# EAGLE board ebook_reader_tsc_pcb (EAGLE 9.7.0)
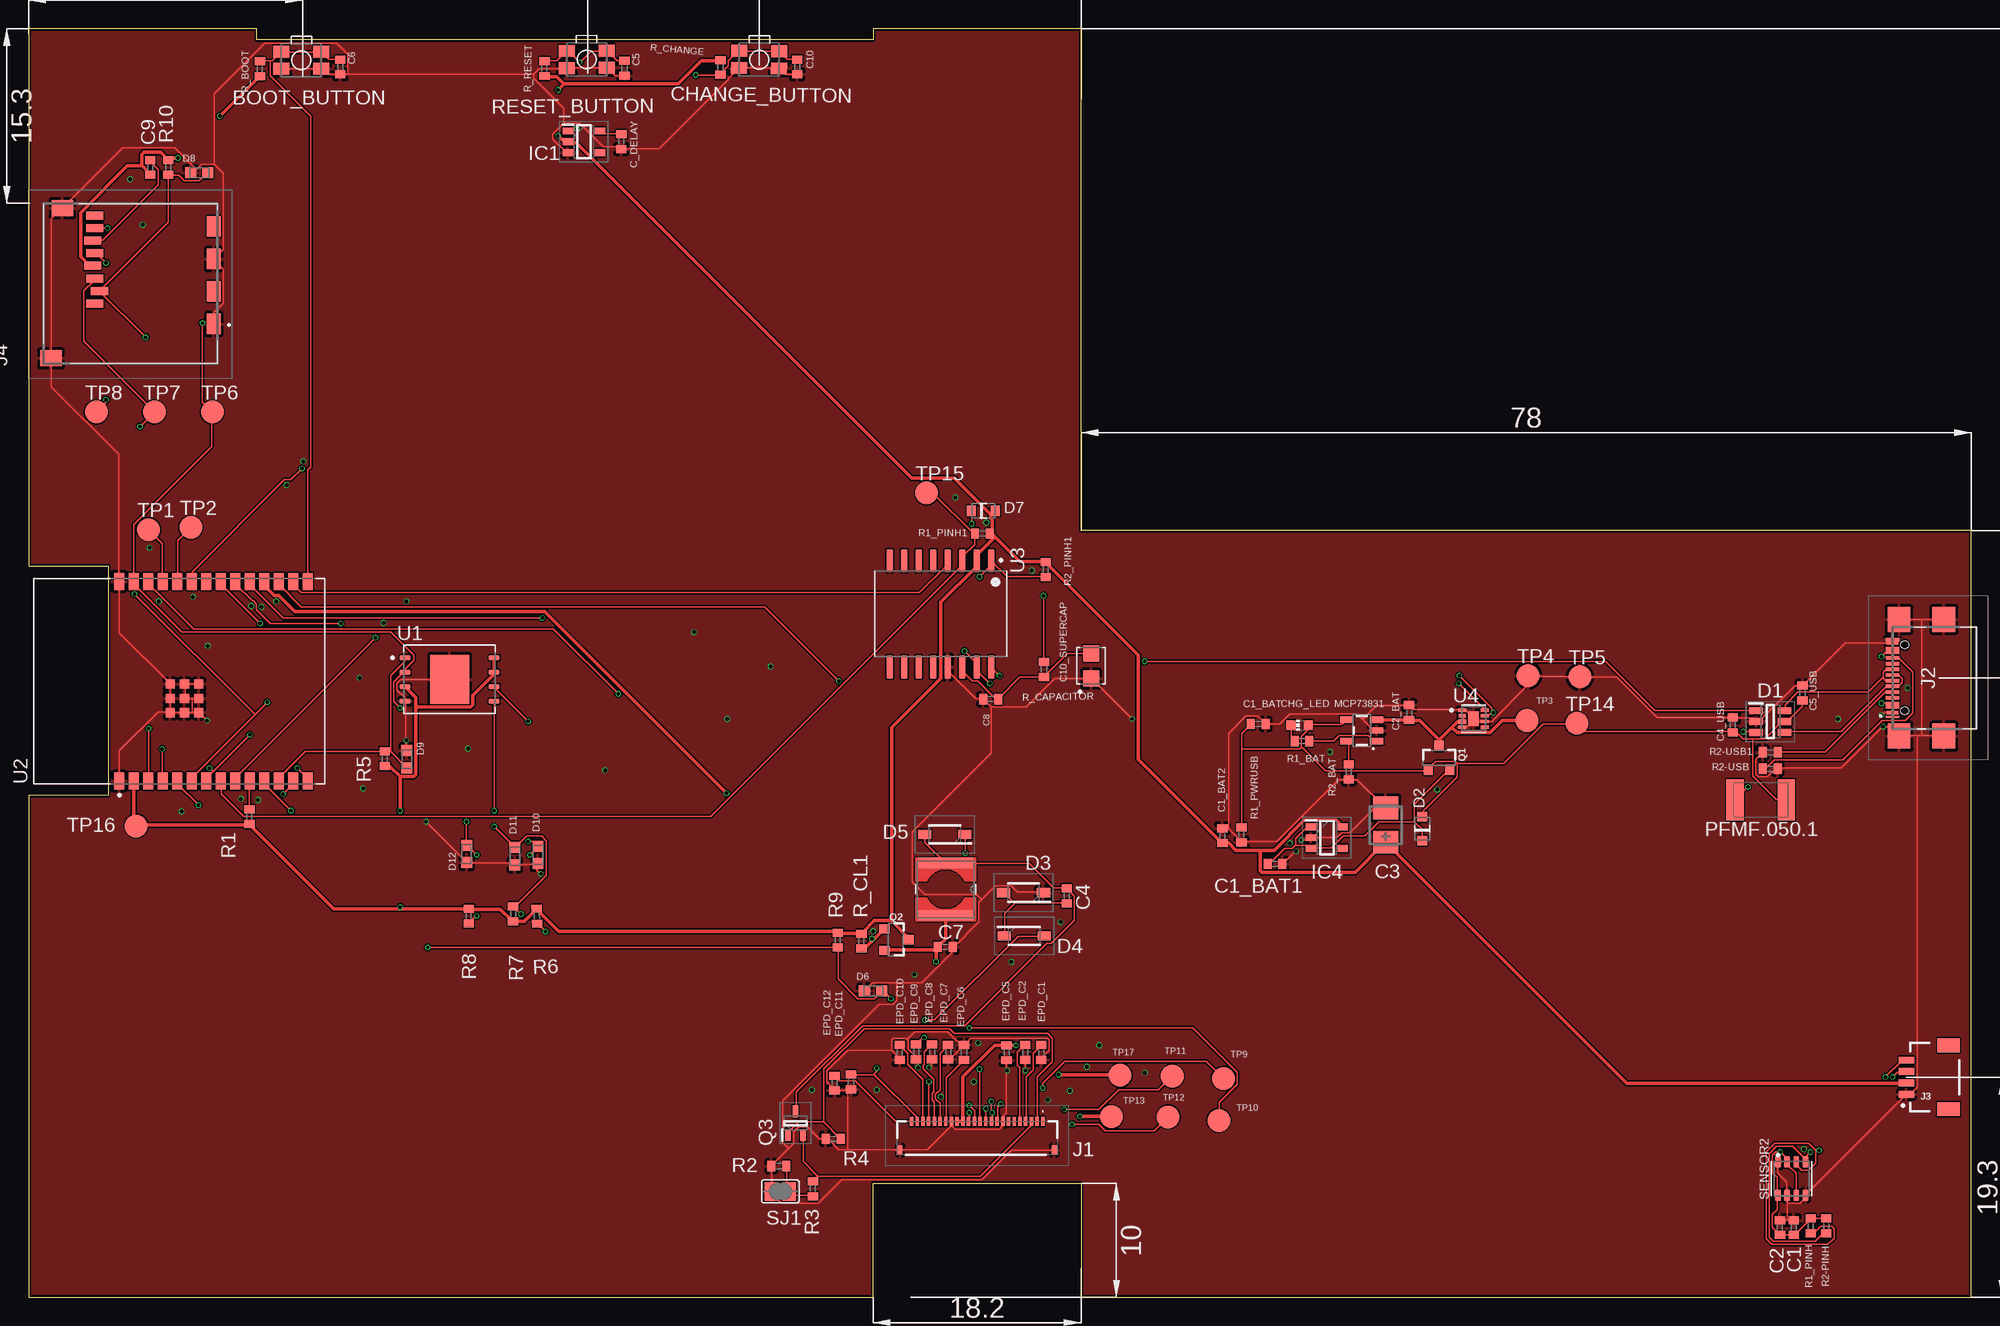
[diagram p0: board, top side]
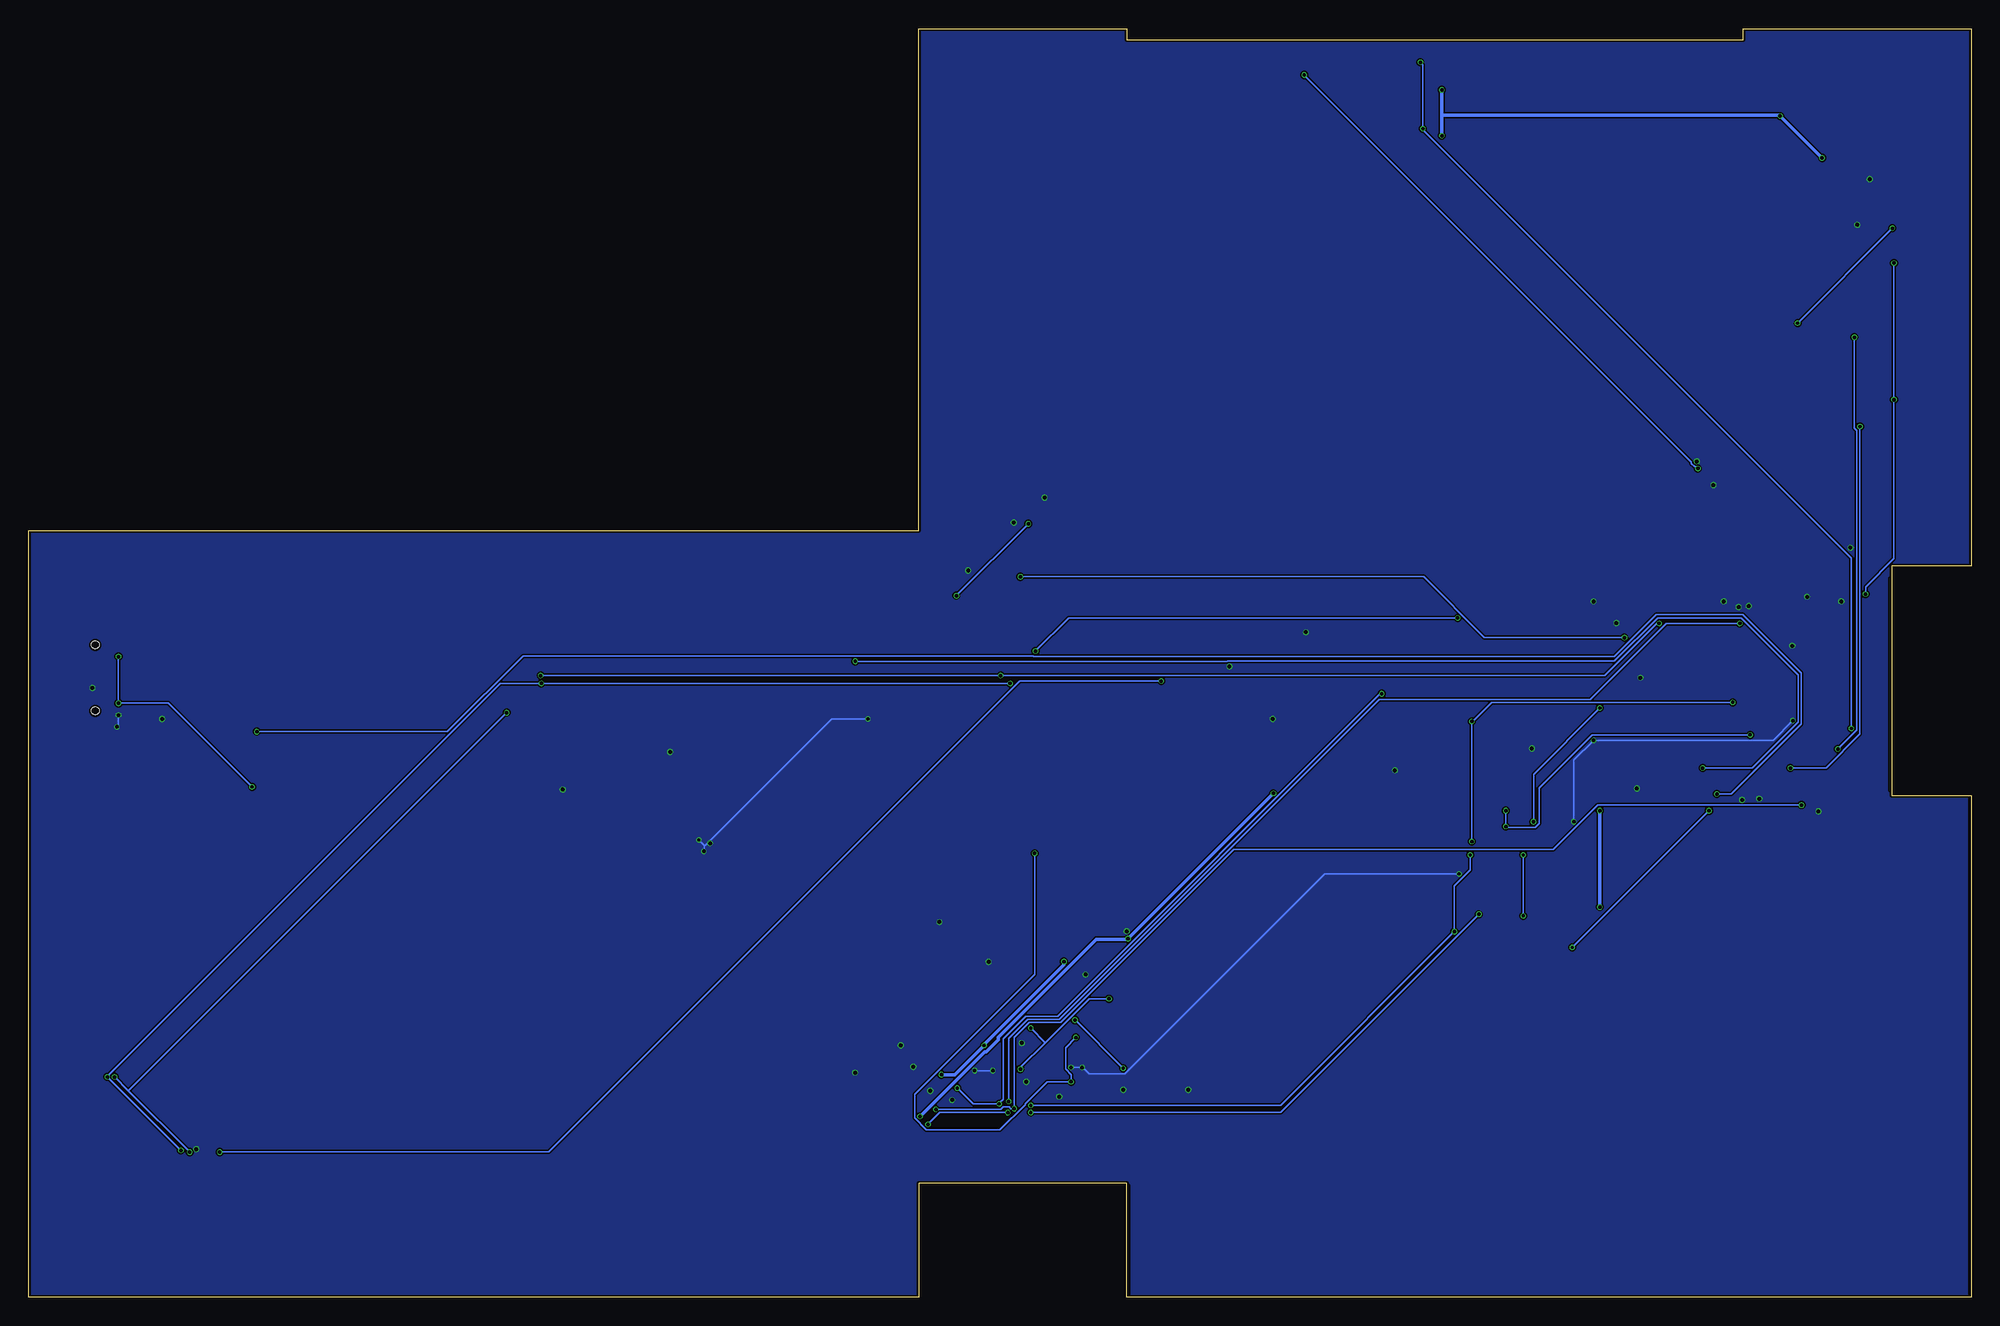
[diagram p1: board, bottom side, seen from below]

Size 170.2 x 111.2 mm. Coordinates in mm from the lower left corner, seen from the top.
Outline: 0,0 74,0 74,10 92.2,10 92.2,0 170.2,0 170.2,67.2 92.2,67.2 92.2,111.2 74,111.2 74,110.2 20,110.2 20,111.2 0,111.2 0,64.1 7,64.1 7,44 0,44 0,0
Copper layers (1*16): Top 0.035mm / dielectric 1.6mm / Bottom 0.035mm
Design rules "jlcpcb-2layers.dru": minimum track width 0.15mm, minimum drill 0.3mm, track to track 5mil, track to pad 5mil, pad to pad 5mil, via to via 5mil, smd to smd 5mil, copper to edge 0.2mm, drill to drill 6mil, minimum pad ring 10mil, minimum via ring 3mil, stop-mask expansion 4mil, vias tented up to drill 0mil, thermal gap 10mil
Net classes: 1 alim: width 0.3 mm

## Footprints (pad centres in the part's own frame; a part is rotated, then mirrored left to right if it is on the bottom)
MYBUTTON = smd 1.4 x 1.05: 1 1.75,0.75; 2 -1.75,0.75; 3 -1.75,-0.75; 4 1.75,-0.75
ESP32_WROVER_EAGLE-LTSPICE_C0402 = smd 0.7 x 0.9: 1 -0.65,0; 2 0.65,0
RCL_CT3528 = smd 2 x 2.2: + -1.5,0; - 1.5,0
CAPCP3225X100N = smd 1.4 x 1.4: 1 -1.1,0; 2 1.1,0
ADAFRUIT_CHIP-LED0603 = smd 0.8 x 0.8: A 0,-0.75; C 0,0.75
SOT95P280X145-6N = smd 1.2 x 0.6: 1 -1.25,0.95; 2 -1.25,0; 3 -1.25,-0.95; 4 1.25,-0.95; 5 1.25,0; 6 1.25,0.95
ESP32_WROVER_AVX---SD0805S020S1R0_AVX_SD0805S020S1R0_0 = smd 0.8 x 0.9: 1 -1.05,0; 2 1.05,0
SOD3716X135N = smd 1.15 x 0.8: 1 -1.75,0; 2 1.75,0
DIOC1608X36N = smd 0.97 x 0.94: 1 -0.75,0; 2 0.75,0
SOT95P280X125-5N = smd 0.9 x 0.6: 1 -1.4,0.95; 2 -1.4,0; 3 -1.4,-0.95; 4 1.4,-0.95; 5 1.4,0.95
SOT95P280X120-5N = smd 0.9 x 0.6: 1 -1.4,0.95; 2 -1.4,0; 3 -1.4,-0.95; 4 1.4,-0.95; 5 1.4,0.95
FH34SRJ24S05SH99 = smd 0.3 x 0.8: 1 5.75,1.45; 2 5.25,1.45; 3 4.75,1.45; 4 4.25,1.45; 5 3.75,1.45; 6 3.25,1.45; 7 2.75,1.45; 8 2.25,1.45; 9 1.75,1.45; 10 1.25,1.45; 11 0.75,1.45; 12 0.25,1.45; 13 -0.25,1.45; 14 -0.75,1.45; 15 -1.25,1.45; 16 -1.75,1.45; 17 -2.25,1.45; 18 -2.75,1.45; 19 -3.25,1.45; 20 -3.75,1.45; 21 -4.25,1.45; 22 -4.75,1.45; 23 -5.25,1.45; 24 -5.75,1.45 | smd 0.4 x 0.8: MP1 6.75,-1.05; MP2 -6.75,-1.05
SAMACSYS_PARTS_USB4110GFA = smd 0.173 x 1.15: A1 -3.426,3.678 | smd 0.3 x 1.15: A4 -2.55,3.678; A5 -1.25,3.678; A6 -0.25,3.678; A7 0.25,3.678; A8 1.25,3.678; A9 2.55,3.678; A12 3.35,3.678; B4 2.25,3.678; B5 1.75,3.678; B6 0.75,3.678; B7 -0.75,3.678; B8 -1.75,3.678; B9 -2.25,3.678 | smd 0.3 x 1.023: B1 3.05,3.678; B12 -3.05,3.678 | smd 2.18 x 2: MP1 -5.11,-0.827; MP2 5.11,-0.827; MP3 -5.11,3.103; MP4 5.11,3.103 | hole 0.65: -2.89,2.603; 2.89,2.603
JST04_1MM_RA = smd 0.6 x 1.35: 1 -1.5,0; 2 -0.5,0; 3 0.5,0; 4 1.5,0 | smd 1.2 x 2: NC1 2.8,-3.675; NC2 -2.8,-3.675
112ATAARR03ATTEND = smd 1.8 x 1.2: G1 10.6,10.4; G2 4.9,10.4; S1 7.75,10.4; S2 2.05,10.4 | smd 1.4 x 1.9: G3 13.6,-3.85; G4 0.45,-2.85 | smd 0.7 x 1.5: P1 8.8,0; P2 7.7,0.4; P3 6.6,0; P4 5.5,-0.2; P5 4.4,0; P6 3.3,-0.2; P7 2.2,0; P8 1.1,0
IND_4828-WE-TPC_WRE = smd 0.889 x 4.826: 1 -2.286,0; 2 2.286,0
ESP32_WROVER_SPARKFUN-IC-POWER_SOT23-5 = smd 0.55 x 1.2: 1 -0.95,-1.3; 2 0,-1.3; 3 0.95,-1.3; 4 0.95,1.3; 5 -0.95,1.3
ESP32C6_VARISTOR_CT/CN1812 = smd 1.5 x 3.6: 1 -2.25,0; 2 2.25,0
ESP32_WROVER_SPARKFUN-DISCRETESEMI_SOT23-3 = smd 0.8 x 0.9: 1 -0.95,-1; 2 0.95,-1; 3 0,1.1
SOT65P210X110-3N = smd 1.05 x 0.5: 1 -1.05,0.65; 2 -1.05,-0.65; 3 1.05,0
ESP32_WROVER_EAGLE-LTSPICE_R0402 = smd 0.7 x 0.9: 1 -0.65,0; 2 0.65,0
ESP32_WROVER_BME680_PSON80P300X300X100-8N = smd 1.016 x 0.5: 1 1.458,1.2; 2 1.458,0.4; 3 1.458,-0.4; 4 1.458,-1.2; 5 -1.458,-1.22; 6 -1.458,-0.4; 7 -1.458,0.4; 8 -1.458,1.2
SJ = smd 1.168 x 1.6: 1 -0.762,0; 2 0.762,0
TP20R = smd 2 x 2: TP 0,0
SON127P600X800X80-9N = smd 0.94 x 0.44: 1 -3.895,1.905; 2 -3.895,0.635; 3 -3.895,-0.635; 4 -3.895,-1.905; 5 3.895,-1.905; 6 3.895,-0.635; 7 3.895,0.635; 8 3.895,1.905 | smd 3.4 x 4.3: 9 0,0
XCVR_ESP32-C6-WROOM-1-N8 = smd 1.5 x 0.9: 1 -8.75,5.26; 2 -8.75,3.99; 3 -8.75,2.72; 4 -8.75,1.45; 5 -8.75,0.18; 6 -8.75,-1.09; 7 -8.75,-2.36; 8 -8.75,-3.63; 9 -8.75,-4.9; 10 -8.75,-6.17; 11 -8.75,-7.44; 12 -8.75,-8.71; 13 -8.75,-9.98; 14 -8.75,-11.25; 15 8.75,-11.25; 16 8.75,-9.98; 17 8.75,-8.71; 18 8.75,-7.44; 19 8.75,-6.17; 20 8.75,-4.9; 21 8.75,-3.63; 22 8.75,-2.36; 23 8.75,-1.09; 24 8.75,0.18; 25 8.75,1.45; 26 8.75,2.72; 27 8.75,3.99; 28 8.75,5.26 | smd 0.8 x 0.8: 29_1 -2.755,0.79; 29_2 -1.505,0.79; 29_3 -0.255,0.79; 29_4 -2.755,-0.46; 29_5 -1.505,-0.46; 29_6 -0.255,-0.46; 29_7 -2.755,-1.71; 29_8 -1.505,-1.71; 29_9 -0.255,-1.71
SOIC127P1032X265-16N = smd 2.05 x 0.59: 1 -4.655,4.445; 2 -4.655,3.175; 3 -4.655,1.905; 4 -4.655,0.635; 5 -4.655,-0.635; 6 -4.655,-1.905; 7 -4.655,-3.175; 8 -4.655,-4.445; 9 4.655,-4.445; 10 4.655,-3.175; 11 4.655,-1.905; 12 4.655,-0.635; 13 4.655,0.635; 14 4.655,1.905; 15 4.655,3.175; 16 4.655,4.445
SON50P200X200X80-9N = smd 0.76 x 0.27: 1 -0.985,0.75; 4 -0.985,-0.75; 5 0.985,-0.75; 6 0.985,-0.25; 7 0.985,0.25; 8 0.985,0.75 | smd 0.709 x 0.321: 2 -0.985,0.25 | smd 0.76 x 0.397: 3 -0.985,-0.25 | smd 0.9 x 1.3: 9 0,0

## Placement (x,y rotation side)
BOOT_BUTTON  BUTTON_CUSYOMV1  [MYBUTTON]  23.9,108.41 180 top
C1  100nF  [ESP32_WROVER_EAGLE-LTSPICE_C0402]  154.64,6.13 90 top
C1_BAT  4.7uF  [ESP32_WROVER_EAGLE-LTSPICE_C0402]  107.73,50.25 0 top
C1_BAT1  4.7uF  [ESP32_WROVER_EAGLE-LTSPICE_C0402]  109.19,37.99 0 top
C1_BAT2  4.7uF  [ESP32_WROVER_EAGLE-LTSPICE_C0402]  104.58,40.47 90 top
C2  100nF  [ESP32_WROVER_EAGLE-LTSPICE_C0402]  153.42,6.13 90 top
C2_BAT  4.7uF  [ESP32_WROVER_EAGLE-LTSPICE_C0402]  120.94,51.25 90 top
C3  100uF  [RCL_CT3528]  118.89,41.4 90 top
C4  4.7uF/25V  [ESP32_WROVER_EAGLE-LTSPICE_C0402]  90.95,35.19 90 top
C4_USB  100nF  [ESP32_WROVER_EAGLE-LTSPICE_C0402]  149.29,50.17 90 top
C5  1uF  [ESP32_WROVER_EAGLE-LTSPICE_C0402]  52.21,107.71 270 top
C5_USB  4.7uF  [ESP32_WROVER_EAGLE-LTSPICE_C0402]  155.4,52.97 90 top
C6  100nF  [ESP32_WROVER_EAGLE-LTSPICE_C0402]  27.3,107.83 270 top
C7  10uF  [ESP32_WROVER_EAGLE-LTSPICE_C0402]  80.29,30.73 0 top
C8  100nF  [ESP32_WROVER_EAGLE-LTSPICE_C0402]  84.28,52.43 180 top
C9  100nF  [ESP32_WROVER_EAGLE-LTSPICE_C0402]  10.66,99.03 90 top
C10  100nF  [ESP32_WROVER_EAGLE-LTSPICE_C0402]  67.34,107.83 270 top
C10_SUPERCAP  CPH3225A  [CAPCP3225X100N]  93.09,55.34 90 top
C_DELAY  100nF  [ESP32_WROVER_EAGLE-LTSPICE_C0402]  51.93,101.29 269.5 top
CHANGE_BUTTON  BUTTON_CUSYOMV1  [MYBUTTON]  64,108.48 179.3 top
CHG_LED  [ADAFRUIT_CHIP-LED0603]  111.34,50.15 90 top
D1  USBLC6-2SC6Y  [SOT95P280X145-6N]  152.58,50.47 0 top
D2  ESP32_WROVER_AVX---SD0805S020S1R0_AVX_SD0805S020S1R0_0_0AVX_SD0805S020S1R0_0_0  [ESP32_WROVER_AVX---SD0805S020S1R0_AVX_SD0805S020S1R0_0]  122.09,41.08 90 top
D3  MBR0530  [SOD3716X135N]  87.16,35.47 180 top
D4  MBR0530  [SOD3716X135N]  87.22,31.68 0 top
D5  MBR0530  [SOD3716X135N]  80.26,40.58 180 top
D6  PGB1010603MR  [DIOC1608X36N]  73.98,26.87 0 top
D7  ESP32_WROVER_AVX---SD0805S020S1R0_AVX_SD0805S020S1R0_0_0AVX_SD0805S020S1R0_0_0  [ESP32_WROVER_AVX---SD0805S020S1R0_AVX_SD0805S020S1R0_0]  83.64,68.93 0 top
D8  PGB1010603MR  [DIOC1608X36N]  14.96,98.57 0 top
D9  PGB1010603MR  [DIOC1608X36N]  33.14,47.17 270 top
D10  PGB1010603MR  [DIOC1608X36N]  44.62,38.77 90 top
D11  PGB1010603MR  [DIOC1608X36N]  42.6,38.67 90 top
D12  PGB1010603MR  [DIOC1608X36N]  38.38,38.87 90 top
EPD_C1  1uF/50V  [ESP32_WROVER_EAGLE-LTSPICE_C0402]  88.71,21.47 90 top
EPD_C2  1uF/50V  [ESP32_WROVER_EAGLE-LTSPICE_C0402]  87.32,21.47 90 top
EPD_C5  1uF/50V  [ESP32_WROVER_EAGLE-LTSPICE_C0402]  85.68,21.45 90 top
EPD_C6  1uF/50V  [ESP32_WROVER_EAGLE-LTSPICE_C0402]  81.95,21.49 270 top
EPD_C7  1uF/50V  [ESP32_WROVER_EAGLE-LTSPICE_C0402]  80.55,21.5 90 top
EPD_C8  1uF/50V  [ESP32_WROVER_EAGLE-LTSPICE_C0402]  79.15,21.51 90 top
EPD_C9  1uF/50V  [ESP32_WROVER_EAGLE-LTSPICE_C0402]  77.75,21.52 90 top
EPD_C10  1uF/50V  [ESP32_WROVER_EAGLE-LTSPICE_C0402]  76.31,21.47 90 top
EPD_C11  1uF/50V  [ESP32_WROVER_EAGLE-LTSPICE_C0402]  72.05,18.89 90 top
EPD_C12  1uF/50V  [ESP32_WROVER_EAGLE-LTSPICE_C0402]  70.61,18.79 90 top
IC1  BD5229G-TR  [SOT95P280X125-5N]  48.65,101.27 0 top
IC4  XC6220A331MR-G  [SOT95P280X120-5N]  113.73,40.29 0 top
J1  FH34SRJ-24S-0.5SH_99_  [FH34SRJ24S05SH99]  83.1,13.97 0 top
J2  SAMACSYS_PARTS_USB4110-GF-A  [SAMACSYS_PARTS_USB4110GFA]  166.96,54.3 90 top
J3  QWIIC_RIGHT_ANGLE  [JST04_1MM_RA]  164.51,19.3 90 top
J4  112A-TAAR-R03_ATTEND  [112ATAARR03ATTEND]  5.82,95.9 270 top
L1  68uH  [IND_4828-WE-TPC_WRE]  80.35,35.77 270 top
MCP73831  ESP32_WROVER_SPARKFUN-IC-POWER_MCP73831  [ESP32_WROVER_SPARKFUN-IC-POWER_SOT23-5]  116.79,49.69 90 top
PFMF.050.1  ESP32C6_VARISTORCN1812  [ESP32C6_VARISTOR_CT/CN1812]  151.74,43.6 0 top
Q1  20V/4.2A/52mΩ/1.4W  [ESP32_WROVER_SPARKFUN-DISCRETESEMI_SOT23-3]  123.56,47.26 0 top
Q2  20V/4.2A/52mΩ/1.4W  [ESP32_WROVER_SPARKFUN-DISCRETESEMI_SOT23-3]  75.98,31.36 270 top
Q3  SI1308EDL-T1-GE3  [SOT65P210X110-3N]  67.19,15.28 90 top
R1  10K  [ESP32_WROVER_EAGLE-LTSPICE_R0402]  19.35,42.13 270 top
R1_BAT  200  [ESP32_WROVER_EAGLE-LTSPICE_R0402]  111.55,48.75 0 top
R1_PINH  10K  [ESP32_WROVER_EAGLE-LTSPICE_R0402]  156.12,6.27 90 top
R1_PINH1  10K  [ESP32_WROVER_EAGLE-LTSPICE_R0402]  83.56,66.94 0 top
R1_PWRUSB  100k  [ESP32_WROVER_EAGLE-LTSPICE_R0402]  106.25,40.54 90 top
R2  2.2  [ESP32_WROVER_EAGLE-LTSPICE_R0402]  65.73,11.51 0 top
R2-PINH  10K  [ESP32_WROVER_EAGLE-LTSPICE_R0402]  157.48,6.27 90 top
R2-USB  5k1  [ESP32_WROVER_EAGLE-LTSPICE_R0402]  152.58,46.33 0 top
R2-USB1  5k1  [ESP32_WROVER_EAGLE-LTSPICE_R0402]  152.56,47.77 0 top
R2_BAT  2K  [ESP32_WROVER_EAGLE-LTSPICE_R0402]  115.66,46.05 90 top
R2_PINH1  10K  [ESP32_WROVER_EAGLE-LTSPICE_R0402]  89.11,63.79 90 top
R3  0.47  [ESP32_WROVER_EAGLE-LTSPICE_R0402]  68.71,9.53 90 top
R4  10K  [ESP32_WROVER_EAGLE-LTSPICE_R0402]  70.49,13.91 0 top
R5  10K  [ESP32_WROVER_EAGLE-LTSPICE_R0402]  31.21,47.21 270 top
R6  10K  [ESP32_WROVER_EAGLE-LTSPICE_R0402]  44.53,33.41 92.2 top
R7  10K  [ESP32_WROVER_EAGLE-LTSPICE_R0402]  42.45,33.61 270 top
R8  10K  [ESP32_WROVER_EAGLE-LTSPICE_R0402]  38.57,33.41 90 top
R9  10K  [ESP32_WROVER_EAGLE-LTSPICE_R0402]  70.89,31.31 90 top
R10  10K  [ESP32_WROVER_EAGLE-LTSPICE_R0402]  12.23,99.03 90 top
R_BOOT  10K  [ESP32_WROVER_EAGLE-LTSPICE_R0402]  20.27,107.67 270 top
R_CAPACITOR  15  [ESP32_WROVER_EAGLE-LTSPICE_R0402]  88.95,55.04 270 top
R_CHANGE  10K  [ESP32_WROVER_EAGLE-LTSPICE_R0402]  60.62,107.78 90 top
R_CL1  10K  [ESP32_WROVER_EAGLE-LTSPICE_R0402]  72.96,31.23 90 top
R_RESET  10K  [ESP32_WROVER_EAGLE-LTSPICE_R0402]  45.19,107.69 269.8 top
RESET_BUTTON  BUTTON_CUSYOMV1  [MYBUTTON]  48.9,108.49 180.4 top
SENSOR2  ESP32_WROVER_BME680_BME680  [ESP32_WROVER_BME680_PSON80P300X300X100-8N]  154.45,10.42 90 top
SJ1  [SJ]  65.86,9.29 0 top
TP1  TPTP20R  [TP20R]  10.51,67.29 0 top
TP2  TPTP20R  [TP20R]  14.23,67.49 0 top
TP3  TPTP20R  [TP20R]  131.25,50.56 0 top
TP4  TPTP20R  [TP20R]  131.37,54.49 0 top
TP5  TPTP20R  [TP20R]  135.89,54.39 0 top
TP6  TPTP20R  [TP20R]  16.11,77.59 0 top
TP7  TPTP20R  [TP20R]  11.03,77.59 0 top
TP8  TPTP20R  [TP20R]  5.95,77.59 0 top
TP9  TPTP20R  [TP20R]  104.67,19.19 0 top
TP10  TPTP20R  [TP20R]  104.28,15.51 0 top
TP11  TPTP20R  [TP20R]  100.19,19.39 0 top
TP12  TPTP20R  [TP20R]  99.83,15.81 0 top
TP13  TPTP20R  [TP20R]  94.86,15.83 0 top
TP14  TPTP20R  [TP20R]  135.63,50.31 0 top
TP15  TPTP20R  [TP20R]  78.68,70.51 0 top
TP16  TPTP20R  [TP20R]  9.43,41.31 0 top
TP17  TPTP20R  [TP20R]  95.62,19.47 0 top
U1  W25Q512JVEIQ  [SON127P600X800X80-9N]  36.89,54.16 0 top
U2  ESP32-C6-WROOM-1-N8  [XCVR_ESP32-C6-WROOM-1-N8]  13.2,54 90 top
U3  DS3231SN#  [SOIC127P1032X265-16N]  79.9,59.9 270 top
U4  MAX17048G+T10  [SON50P200X200X80-9N]  126.58,50.72 0 top

## Library data of the parts
BOOT_BUTTON CHANGE_BUTTON CHG_LED PFMF.050.1 RESET_BUTTON SJ1 TP1-TP17 = DeskAssistant v19 v1
C1 C1_BAT C1_BAT1 C1_BAT2 C2 C2_BAT C4 C4_USB C5 C5_USB C6-C10 C_DELAY EPD_C1 EPD_C2 EPD_C5-EPD_C12 = DeskAssistant v19 v1; SPICEMODEL: NONE; SPICEPREFIX: C
C3 = DeskAssistant v19 v1; SPICEPREFIX: C
C10_SUPERCAP = DeskAssistant v19 v1; AVAILABILITY: Not in stock; CHECK_PRICES: https://www.snapeda.com/parts/CPH3225A/Seiko+Instruments/view-part/?ref=eda; DESCRIPTION: 11 mF (EDLC) Supercapacitor 3.3 V 1210 (3225 Metric) - -; MF: Seiko Instruments; MP: CPH3225A; PACKAGE: 1210 Seiko; PRICE: None; PURCHASE-URL: https://www.snapeda.com/api/url_track_click_mouser/?unipart_id=562593&manufacturer=Seiko Instruments&part_name=CPH3225A&search_term=None; SNAPEDA_LINK: https://www.snapeda.com/parts/CPH3225A/Seiko+Instruments/view-part/?ref=snap
D1 = DeskAssistant v19 v1; AVAILABILITY: In Stock; CHECK_PRICES: https://www.snapeda.com/parts/USBLC6-2SC6Y/STMicroelectronics/view-part/?ref=eda; DESCRIPTION: 17V Clamp 5A (8/20µs) Ipp Tvs Diode Surface Mount SOT-23-6; MF: STMicroelectronics; MP: USBLC6-2SC6Y; PACKAGE: SOT-23-6 STMicroelectronics; PRICE: None; SNAPEDA_LINK: https://www.snapeda.com/parts/USBLC6-2SC6Y/STMicroelectronics/view-part/?ref=snap
D2 D7 = DeskAssistant v19 v1; CENTROID_NOT_SPECIFIED: No; DATASHEET: http://datasheets.avx.com/schottky.pdf; DIGIKEY_DESCRIPTION: DIODE SCHOTTKY 20V 1A 0805; DIGIKEY_PART_NUMBER: 478-7800-1-ND; LEAD_FREE: yes; MF: AVX; MOUSER_PART_NUMBER: 581-SD0805S020S1R0; PACKAGE: 0805 (2012 metric); PREFIX: D; ROHS: yes; TEMPERATURE_RANGE_HIGH: +125°C; TEMPERATURE_RANGE_LOW: -55°C
D3-D5 = DeskAssistant v19 v1; AVAILABILITY: In Stock; CHECK_PRICES: https://www.snapeda.com/parts/MBR0530/Onsemi/view-part/?ref=eda; DESCRIPTION: Diode Schottky 30 V 500mA Surface Mount SOD-123; MF: ON Semiconductor; MP: MBR0530; PACKAGE: SOD-123-2 ON Semiconductor; PRICE: None; PURCHASE-URL: https://www.snapeda.com/api/url_track_click_mouser/?unipart_id=179458&manufacturer=ON Semiconductor&part_name=MBR0530&search_term=None; SNAPEDA_LINK: https://www.snapeda.com/parts/MBR0530/Onsemi/view-part/?ref=snap
D6 D8-D12 = DeskAssistant v19 v1; AVAILABILITY: In Stock; CHECK_PRICES: https://www.snapeda.com/parts/PGB1010603MR/Littelfuse/view-part/?ref=eda; DESCRIPTION: 150V (Typ) Clamp - Ipp Tvs Diode Surface Mount 0603 (1608 Metric); MF: Littelfuse Inc.; MP: PGB1010603MR; PACKAGE: 0603 Littelfuse Inc.; PRICE: None; PURCHASE-URL: https://www.snapeda.com/api/url_track_click_mouser/?unipart_id=5659453&manufacturer=Littelfuse Inc.&part_name=PGB1010603MR&search_term=None; SNAPEDA_LINK: https://www.snapeda.com/parts/PGB1010603MR/Littelfuse/view-part/?ref=snap
IC1 = DeskAssistant v19 v1; DESCRIPTION: Voltage Detector with Adjustable Delay Time: CMOS processes are utilized to develop high precision, low current consumption CMOS reset ICs that allow arbitrary setting of the delay time. The extensive lineup includes both Nch Open Drain and CMOS output types in a wide range of detection voltages (from 2.3V to 6.0V, in 0.1V steps), enabling selection of the ideal solution based on customer requirements. In addition, the entire series is of course both lead-free and RoHS-compliant.; HEIGHT: 1.25mm; MANUFACTURER_NAME: ROHM Semiconductor; MANUFACTURER_PART_NUMBER: BD5229G-TR; MOUSER_PART_NUMBER: 755-BD5229G-TR; MOUSER_PRICE-STOCK: https://www.mouser.co.uk/ProductDetail/ROHM-Semiconductor/BD5229G-TR?qs=4kLU8WoGk0vvnhrrYwdszw%3D%3D
IC4 = DeskAssistant v19 v1; DESCRIPTION: LDO Voltage Regulators; HEIGHT: 1.2mm; MANUFACTURER_NAME: Torex; MANUFACTURER_PART_NUMBER: XC6220A331MR-G; MOUSER_PART_NUMBER: 865-XC6220A331MR-G; MOUSER_PRICE-STOCK: https://www.mouser.co.uk/ProductDetail/Torex-Semiconductor/XC6220A331MR-G?qs=AsjdqWjXhJ8ZSWznL1J0gg%3D%3D
J1 = DeskAssistant v19 v1; DESCRIPTION: 24 Position FFC, FPC Connector Contacts, Top and Bottom 0.020" (0.50mm) Surface Mount, Right Angle; HEIGHT: 1.1mm; MANUFACTURER_NAME: Hirose; MANUFACTURER_PART_NUMBER: FH34SRJ-24S-0.5SH(99); MOUSER_PART_NUMBER: 798-FH34SRJ24S05SH99; MOUSER_PRICE-STOCK: https://www.mouser.co.uk/ProductDetail/Hirose-Connector/FH34SRJ-24S-0.5SH99?qs=vcbW%252B4%252BSTIpKBl5ap9J8Fw%3D%3D
J2 = DeskAssistant v19 v1; DESCRIPTION: CONN USB 2.0 TYPE-C R/A SMT; HEIGHT: 3.26mm; MANUFACTURER_NAME: GCT (GLOBAL CONNECTOR TECHNOLOGY); MANUFACTURER_PART_NUMBER: USB4110-GF-A; MOUSER_PART_NUMBER: 640-USB4110-GF-A; MOUSER_PRICE-STOCK: https://www.mouser.co.uk/ProductDetail/GCT/USB4110-GF-A?qs=KUoIvG%2F9IlYiZvIXQjyJeA%3D%3D
J3 = DeskAssistant v19 v1; PROD_ID: CONN-13694
J4 = DeskAssistant v19 v1; DESCRIPTION: Micro SD Card Socket, Push-Push Type, Top Mount, SMT, H=1.83mm, 10u; HEIGHT: 1.9mm; MANUFACTURER_NAME: ATTEND; MANUFACTURER_PART_NUMBER: 112A-TAAR-R03 ATTEND
L1 = DeskAssistant v19 v1; COPYRIGHT: Copyright (C) 2024 Ultra Librarian. All rights reserved.; MANUFACTURER_PART_NUMBER: 744043680; MFR_NAME: Wurth Electronics
MCP73831 = DeskAssistant v19 v1; PROD_ID: IC-09995
Q1 Q2 = DeskAssistant v19 v1; PROD_ID: TRAN-14388
Q3 = DeskAssistant v19 v1; AVAILABILITY: In Stock; CHECK_PRICES: https://www.snapeda.com/parts/SI1308EDL-T1-GE3/Vishay+Siliconix/view-part/?ref=eda; DESCRIPTION: Si1308EDL-T1-GE3 N-channel MOSFET Transistor, 1.5 A, 30 V, 3-Pin SC-70 | Siliconix / Vishay SI1308EDL-T1-GE3; MF: Vishay Siliconix; MP: SI1308EDL-T1-GE3; PACKAGE: SOT-323 Vishay Semiconductor; PRICE: None; PURCHASE-URL: https://www.snapeda.com/api/url_track_click_mouser/?unipart_id=274603&manufacturer=Vishay Siliconix&part_name=SI1308EDL-T1-GE3&search_term=None; SNAPEDA_LINK: https://www.snapeda.com/parts/SI1308EDL-T1-GE3/Vishay+Siliconix/view-part/?ref=snap
R1 R1_BAT R1_PINH R1_PINH1 R1_PWRUSB R2 R2-PINH R2-USB R2-USB1 R2_BAT R2_PINH1 R3-R10 R_BOOT R_CAPACITOR R_CHANGE R_CL1 R_RESET = DeskAssistant v19 v1; SPICEMODEL: NONE; SPICEPREFIX: R
SENSOR2 = DeskAssistant v19 v1; AVAILABILITY: Unavailable; DESCRIPTION: Integrated Environmental Unit; MF: Bosch Sensortec; MP: BME680; PACKAGE: LGA-8 Bosch Tools; PRICE: None
U1 = DeskAssistant v19 v1; AVAILABILITY: In Stock; CHECK_PRICES: https://www.snapeda.com/parts/W25Q512JVEIQ/Winbond+Electronics/view-part/?ref=eda; DESCRIPTION: FLASH - NOR Memory IC 512Mb (64M x 8) SPI - Quad I/O 133 MHz 8-WSON (8x6); MF: Winbond Electronics; MP: W25Q512JVEIQ; PACKAGE: Package; PRICE: None; SNAPEDA_LINK: https://www.snapeda.com/parts/W25Q512JVEIQ/Winbond+Electronics/view-part/?ref=snap
U2 = DeskAssistant v19 v1; AVAILABILITY: In Stock; CHECK_PRICES: https://www.snapeda.com/parts/ESP32-C6-WROOM-1-N8/Espressif+Systems/view-part/?ref=eda; DESCRIPTION: Multiprotocol Modules ESP32-C6 module, Wi-Fi 6 in 2.4 GHz band, Bluetooth 5, Zigbee 3.0 and Thread. ESP34-WROOM Compatible - ENGINEERING SAMPLE; MF: Espressif Systems; MP: ESP32-C6-WROOM-1-N8; PACKAGE: None; PRICE: None; SNAPEDA_LINK: https://www.snapeda.com/parts/ESP32-C6-WROOM-1-N8/Espressif+Systems/view-part/?ref=snap
U3 = DeskAssistant v19 v1; AVAILABILITY: In Stock; CHECK_PRICES: https://www.snapeda.com/parts/DS3231SN%23/Analog+Devices/view-part/?ref=eda; DESCRIPTION: Extremely Accurate I²C-Integrated RTC/TCXO/Crystal; MF: Analog Devices; MP: DS3231SN#; PACKAGE: SOIC-16 Maxim; PRICE: None; PURCHASE-URL: https://www.snapeda.com/api/url_track_click_mouser/?unipart_id=99048&manufacturer=Analog Devices&part_name=DS3231SN#&search_term=None; SNAPEDA_LINK: https://www.snapeda.com/parts/DS3231SN%23/Analog+Devices/view-part/?ref=snap
U4 = DeskAssistant v19 v1; AVAILABILITY: In Stock; CHECK_PRICES: https://www.snapeda.com/parts/MAX17048G+T10/Analog+Devices/view-part/?ref=eda; DESCRIPTION: 3µA 1-Cell/2-Cell Fuel Gauge with ModelGauge; MF: Analog Devices; MP: MAX17048G+T10; PACKAGE: TDFN-8 Maxim; PRICE: None; PURCHASE-URL: https://www.snapeda.com/api/url_track_click_mouser/?unipart_id=329239&manufacturer=Analog Devices&part_name=MAX17048G+T10&search_term=None; SNAPEDA_LINK: https://www.snapeda.com/parts/MAX17048G+T10/Analog+Devices/view-part/?ref=snap

## Nets
3V3 [alim]: C1_BAT2.1 C3.+ C9.1 D7.2 IC1.2 IC4.5 J3.2 J4.P4 Q2.3 R1.2 R1_PINH1.2 R2_PINH1.2 R5.2 R6.2 R7.2 R8.2 R9.2 R10.2 R_BOOT.2 R_CHANGE.2 R_CL1.2 R_RESET.2 TP16.TP U1.3 U1.7 U1.8 U2.2 U3.2
32KHZ: R2_PINH1.1 U2.9 U3.1
DN: D1.4 J2.A7 J2.B7
DP: D1.6 J2.A6 J2.B6
EPD_3V3 [alim]: C7.1 EPD_C5.2 J1.15 J1.16 L1.2 Q2.2 TP17.TP
EPD_3V3_C [alim]: Q2.1 R_CL1.1 TP13.TP U2.18
EPD_BUSY: J1.9 TP9.TP U2.26
EPD_CS: D6.2 J1.12 R9.1 TP10.TP U2.11
EPD_DC: J1.11 TP11.TP U2.5
EPD_RST: J1.10 TP12.TP U2.21
FLASH_CS: D9.2 R5.1 U1.1 U2.12
GDR: J1.2 Q3.1 R4.2
GND: BOOT_BUTTON.1 BOOT_BUTTON.2 C1.2 C1_BAT1.2 C1_BAT2.2 C1_BAT.2 C2.2 C2_BAT.2 C3.- C4_USB.2 C5.2 C5_USB.2 C6.2 C7.2 C8.2 C10.2 C10_SUPERCAP.1 C_DELAY.2 CHANGE_BUTTON.1 CHANGE_BUTTON.2 D1.2 D3.1 D6.1 D8.1 D9.1 D10.1 D11.1 D12.1 EPD_C1.1 EPD_C2.1 EPD_C5.1 EPD_C6.1 EPD_C7.1 EPD_C8.1 EPD_C9.1 EPD_C10.1 EPD_C11.1 EPD_C12.1 IC1.3 IC4.2 J1.8 J1.17 J1.MP1 J1.MP2 J2.A12 J2.B1 J2.B12 J2.MP1 J2.MP2 J2.MP3 J2.MP4 J3.1 J4.G1 J4.G2 J4.G3 J4.G4 MCP73831.2 R1_PWRUSB.1 R2-USB1.1 R2-USB.2 R2.1 R2_BAT.1 R4.1 RESET_BUTTON.1 RESET_BUTTON.2 SENSOR2.1 SENSOR2.5 SENSOR2.7 SJ1.1 TP4.TP TP5.TP U1.4 U1.9 U2.1 U2.28 U2.29_1 U2.29_2 U2.29_3 U2.29_4 U2.29_5 U2.29_6 U2.29_7 U2.29_8 U2.29_9 U3.13 U4.1 U4.4 U4.6 U4.9
GPIO8: R1.1 U2.10
I2C_PW: C1.1 C2.1 R1_PINH.2 R2-PINH.2 SENSOR2.2 SENSOR2.6 SENSOR2.8 U2.17
INT_RTC: R1_PINH1.1 TP15.TP U2.8 U3.3
IO/BOOT: BOOT_BUTTON.3 BOOT_BUTTON.4 C6.1 R_BOOT.1 U2.15
IO/CHANGE: C10.1 CHANGE_BUTTON.3 CHANGE_BUTTON.4 R_CHANGE.1 U2.23
MISO: D12.2 J4.P7 R8.1 TP6.TP U1.2 U2.27
MOSI: D11.2 J1.14 J4.P3 R7.1 TP7.TP U1.5 U2.7
N$1: J2.A1
N$2: J2.A5 R2-USB1.2
N$3: J2.B5 R2-USB.1
N$4: MCP73831.5 R2_BAT.2
N$5: C1_BAT1.1 D2.1 IC4.1 IC4.3 Q1.2
N$6: C9.2 J4.P6
N$7: CHG_LED.C R1_BAT.1
N$8: C4.1 D3.2 D4.1
N$9: MCP73831.1 R1_BAT.2
N$10: EPD_C1.2 J1.4
N$11: C_DELAY.1 IC1.5
N$12: D7.1 R_CAPACITOR.1
N$13: EPD_C2.2 J1.5
N$14: EPD_C12.2 J1.24
N$15: EPD_C10.2 J1.22
N$16: EPD_C8.2 J1.20
N$17: EPD_C7.2 J1.19
N$18: EPD_C6.2 J1.18
PREVGH: D5.1 EPD_C9.2 J1.21
PREVGL: D4.2 EPD_C11.2 J1.23
RESE: J1.3 Q3.2 R3.2
RESE': R2.2 R3.1 SJ1.2
RESET: C5.1 IC1.1 R_RESET.1 RESET_BUTTON.3 RESET_BUTTON.4 U2.3
RTC_RST: U2.16 U3.4
RX: TP2.TP U2.24
SCK: D10.2 J1.13 J4.P5 R6.1 TP8.TP U1.6 U2.6
SCL: J3.4 R2-PINH.1 SENSOR2.4 U2.20 U3.16 U4.7
SDA: J3.3 R1_PINH.1 SENSOR2.3 U2.19 U3.15 U4.8
SRC: C4.2 D5.2 L1.1 Q3.3
SS_SD: D8.2 J4.P2 R10.1 U2.4
TX: TP1.TP U2.25
USB_D+: D1.1 U2.14
USB_D-: D1.3 U2.13
VBAT [alim]: C2_BAT.1 MCP73831.3 Q1.3 TP3.TP U4.2 U4.3
VBUS: C1_BAT.1 C4_USB.1 C5_USB.1 CHG_LED.A D1.5 D2.2 MCP73831.4 PFMF.050.1.2 Q1.1 R1_PWRUSB.2 TP14.TP
VRTC: C8.1 C10_SUPERCAP.2 R_CAPACITOR.2 U3.14
VUSB: J2.A4 J2.A9 J2.B4 J2.B9 PFMF.050.1.1

## Tracks (layer width: path | path; a pad name or v marks a point on that pad's centre or on a via)
3V3  (via drill 0.3)
  Top 0.3: U1.8 40.79,56.02 40.79,54.85 U1.7 40.72,54.71 40.72,54.57 38.92,52.77 38.92,51.94 38.71,51.73 33.93,51.73 | 32.55,45.64 31.65,46.54 31.23,46.54 R5.2 | 32.55,45.64 33.73,45.64 33.93,45.84 33.93,51.73 | 33.93,51.73 33.93,52.56 33.03,53.46 U1.3 | 75.55,33.03 77.08,31.51 Q2.3 | 75.55,33.03 74.1,33.03 73.06,31.99 R_CL1.2 72.92,31.92 70.91,31.92 R9.2 70.77,32.06 46.47,32.06 44.6,33.93 R6.2 44.46,34 43.42,32.96 R7.2 42.31,33.03 41.34,34 38.57,34 R8.2 38.43,34.07 32.55,34.07 | U2.2 9.21,45.22 9.21,41.83 9.49,41.55 TP16.TP 9.49,41.34 9.56,41.41 19.32,41.41 R1.2 19.46,41.34 26.73,34.07 32.55,34.07 | v32.55,42.66 32.55,45.64 | v32.55,34.21 32.55,34.07 | 46.88,106.37 46.26,106.99 45.22,106.99 R_RESET.2 | 46.88,106.37 56.92,106.37 58.93,108.38 60.59,108.38 R_CHANGE.2 | v46.4,101.8 46.88,101.31 47.23,101.31 IC1.2 47.37,101.17 47.99,101.17 77.35,71.81 81.09,71.81 84.21,68.7 84.28,68.56 | v46.4,105.81 46.81,106.23 46.88,106.37 | 9.9,99.23 10.6,98.54 10.6,98.4 C9.1 | 9.9,99.23 9.9,100.14 10.11,100.34 11.56,100.34 12.19,99.72 R10.2 12.26,99.86 v13.09,99.86 | v16.76,103.53 20.22,106.99 R_BOOT.2 | J4.P4 5.61,90.44 5.33,90.44 4.57,91.2 4.57,95.08 8.66,99.17 9.76,99.17 9.9,99.23 | 84.28,68.56 84.62,68.9 D7.2 | R1_PINH1.2 84.42,66.89 86.84,64.47 89.06,64.47 R2_PINH1.2 89.19,64.33 97.23,56.3 97.23,47.16 104.5,39.89 C1_BAT2.1 104.64,39.82 105.12,39.82 105.75,39.2 107.89,39.2 | R1_PINH1.2 84.55,66.55 83.1,65.09 83.1,64.61 U3.2 82.96,64.47 82.96,63.99 79.92,60.94 79.92,54.22 75.62,49.93 75.62,33.17 75.55,33.03 | 107.89,39.2 109.14,39.2 111.77,41.83 114.54,41.83 115.09,41.27 IC4.5
  Top 0.3: J3.2 164.47,18.77 140.02,18.77 118.9,39.89 C3.+ 118.76,39.82 116.2,37.26 108.03,37.26 107.89,37.4 107.89,39.2 | 84.28,68.56 84.28,68.27 84.43,68.12 84.43,67.16 R1_PINH1.2
  Bottom 0.3: v32.55,34.21 v32.55,42.66 | v46.4,105.81 46.4,103.6 | 46.4,103.6 v46.4,101.8 | v13.09,99.86 v16.76,103.53 16.9,103.6 46.4,103.6
32KHZ  (via drill 0.3)
  Top 0.15: R2_PINH1.1 89.06,63.16 85.73,63.16 U3.1 84.48,64.33 v83.31,63.16 | v30.4,57.82 18.14,45.57 18.14,45.29 U2.9
  Bottom 0.15: v30.4,57.82 42.66,57.82 47.99,63.16 v83.31,63.16
DN
  Top 0.15: J2.A7 163.29,54.5 163.84,54.5 164.12,54.22 164.12,53.88 163.84,53.6 163.29,53.6 J2.B7 163.22,53.53 162.74,53.53 158.79,49.58 153.87,49.58 D1.4
DP
  Top 0.15: 162.46,54.29 162.67,54.08 163.22,54.08 J2.A6 | 162.46,54.29 162.46,54.78 162.67,54.98 163.22,54.98 J2.B6 | D1.6 153.87,51.45 153.87,51.94 154.98,53.05 161.15,53.05 162.39,54.29 162.46,54.29
EPD_3V3  (via drill 0.3)
  Top 0.3: Q2.2 75,30.47 79.43,30.47 79.64,30.68 C7.1 | L1.2 80.33,33.45 80.33,31.44 79.71,30.82 C7.1 | J1.16 81.37,15.44 81.78,15.44 J1.15 81.85,15.58 81.85,19.32 84.62,22.09 85.66,22.09 EPD_C5.2 85.8,22.09 v86.49,22.09 | v90.23,19.53 95.56,19.53 TP17.TP | v79.5,29.43 79.5,30.33 C7.1
  Bottom 0.3: v90.23,19.53 89.06,19.53 v86.49,22.09 86.42,22.23 79.5,29.15 v79.5,29.43
EPD_3V3_C  (via drill 0.3)
  Top 0.3: 73.99,31.34 74.93,32.27 Q2.1 | 73.99,31.34 73.27,30.61 72.99,30.61 R_CL1.1 | v61.15,44.18 45.22,60.11 23.34,60.11 21.92,61.53 21.54,61.53 20.71,62.36 20.71,62.74 U2.18 | v73.89,31.44 73.99,31.34 | v92.1,15.86 94.8,15.86 TP13.TP
  Bottom 0.3: v61.15,44.18 v73.89,31.44 74.03,31.37 76.66,31.37 85.25,22.78 85.25,22.58 86.28,21.54 86.42,21.54 v92.1,15.86
EPD_BUSY  (via drill 0.3)
  Top 0.15: v85.18,16.97 84.9,16.69 84.9,15.44 J1.9 | v88.85,18.35 88.85,18.77 90.79,20.71 103.18,20.71 104.64,19.25 TP9.TP | v51.66,52.91 45.98,58.59 14.46,58.59 11.59,61.45 11.56,61.45 10.53,62.49 10.53,62.74 U2.26
  Bottom 0.15: v88.85,18.35 87.46,16.97 v85.18,16.97 85.18,17.04 84.83,17.38 84.83,22.64 82.82,24.65 80.05,24.65 51.8,52.91 v51.66,52.91
EPD_CS  (via drill 0.3)
  Top 0.15: v83.31,20.01 83.31,15.44 J1.12 | v75.55,26.18 74.79,26.94 D6.2 74.72,26.8 74.1,26.18 72.64,26.18 70.91,27.91 70.91,30.61 R9.1 70.84,30.68 v34.97,30.68 | v22.99,42.66 20.71,44.94 20.71,45.22 U2.11 | v82.41,23.61 102,23.61 105.88,19.74 105.88,18.7 104.29,17.11 TP10.TP
  Bottom 0.15: v83.31,20.01 83.31,20.15 81.13,22.33 | 81.13,22.33 77.28,26.18 v75.55,26.18 | v34.97,30.68 v22.99,42.66 | 81.13,22.33 v82.41,23.61
EPD_DC  (via drill 0.3)
  Top 0.15: v83.86,16.55 83.86,15.44 J1.11 | v90.72,16.48 93.76,16.48 95.5,18.21 98.96,18.21 100.14,19.39 TP11.TP | v14.89,43.14 13.09,44.94 13.09,45.22 U2.5
  Bottom 0.15: v90.72,16.48 85.04,16.48 84.83,16.69 84.28,16.69 84.14,16.55 v83.86,16.55 83.86,22.78 82.55,24.1 79.78,24.1 64.61,39.27 36.63,39.27 32.76,43.14 v14.89,43.14
EPD_RST  (via drill 0.3)
  Top 0.15: v91.41,15.17 93.76,15.17 94.32,14.61 98.61,14.61 99.79,15.79 TP12.TP | J1.10 84.42,15.44 v84.42,16.2 84.35,16.2 v84.35,17.17 | v20.29,59.07 16.9,62.46 16.9,62.74 U2.21
  Bottom 0.15: v84.42,16.2 90.37,16.2 v91.41,15.17 | v20.29,59.07 26.73,59.07 33.38,52.42 51.87,52.42 79.92,24.38 82.68,24.38 84.35,22.71 v84.35,17.17
FLASH_CS
  Top 0.15: 31.72,47.85 31.23,47.85 R5.1 31.16,47.85 24.24,47.85 21.95,45.57 21.95,45.29 U2.12 | 31.72,47.85 33.1,46.47 D9.2 | 31.72,47.85 31.72,54.5 32.96,55.75 32.96,56.02 U1.1
GDR
  Top 0.15: 69.67,15.37 69.67,20.01 73.2,23.55 80.68,23.55 81.09,23.13 89.26,23.13 89.68,22.71 89.68,20.64 88.36,19.32 88.36,15.44 J1.2 | 69.67,15.37 71.12,13.92 R4.2 | 69.67,15.37 67.45,15.37 66.55,14.47 66.55,14.27 Q3.1
GND  (via drill 0.3, 0.35)
  Top 0.15: C10.2 67.31,107.2 66.27,107.2 65.79,107.68 CHANGE_BUTTON.2 65.72,107.75 62.26,107.75 CHANGE_BUTTON.1 62.19,107.68 61.29,106.78 61.29,106.71 55.26,100.69 51.94,100.69 C_DELAY.2 51.87,100.69 51.73,100.83 50.34,100.83 48.27,102.91 46.88,102.91 | 46.88,102.91 45.91,101.94 45.91,101.52 47.09,100.34 47.23,100.34 IC1.3 | BOOT_BUTTON.1 22.16,107.68 25.62,107.68 BOOT_BUTTON.2 25.69,107.61 26.11,107.2 27.29,107.2 C6.2 27.35,107.2 27.98,107.2 | C5.2 52.15,107.06 51.38,107.06 50.69,107.75 RESET_BUTTON.2 50.62,107.75 47.16,107.75 RESET_BUTTON.1 47.09,107.68 44.74,107.68 44.25,107.2 | 44.25,107.2 27.98,107.2 | 46.88,102.91 46.88,104.22 44.25,106.85 44.25,107.2 | 33.03,48.82 33.03,47.99 33.1,47.92 D9.1 | 33.03,48.82 33.03,52.22 U1.4 32.96,52.28 32.96,52.56 32.27,53.25 32.27,53.81 32.62,54.15 36.84,54.15 U1.9 | v34.83,41.69 38.36,38.16 D12.1 38.43,38.09 42.45,38.09 42.59,37.95 D11.1 42.66,37.95 44.53,37.95 44.6,38.02 D10.1 44.53,37.88 44.53,37.46 v44.87,37.12 | v33.1,48.82 33.03,48.82 | 14.34,52.49 14.89,52.49 U2.29_8 | 14.34,52.49 13.71,52.49 U2.29_5 13.71,52.56 13.71,53.67 U2.29_6 13.71,53.74 14.89,53.74 U2.29_9 | U2.29_1 U2.29_4 14.34,51.24 | U2.29_1 12.4,51.31 12.4,52.49 U2.29_2 12.4,52.56 12.4,53.74 U2.29_3 12.4,53.81 7.96,58.24 7.96,62.74 U2.28 7.89,62.81 7.89,73.89 2.01,79.78 2.01,82.27 J4.G3 2.01,82.34 2.01,94.53 2.91,95.43 J4.G4 2.98,95.5 8.24,100.76 12.81,100.76 14.68,98.89 D8.1 14.27,98.61 14.47,98.61 15.17,99.31 16.27,99.31 | 14.34,51.24 U2.29_7 14.96,51.24 v15.65,50.55 | U2.1 7.96,45.29 7.96,47.92 11.36,51.31 12.33,51.31 U2.29_1
  Top 0.15: 14.34,51.24 14.34,52.49 | 16.27,99.31 17.04,98.54 17.04,91.83 16.27,91.06 J4.G2 16.2,90.92 17.04,90.09 17.04,87.12 16.27,86.36 16.27,85.32 J4.G1 | 27.98,107.2 27.98,108.93 27.01,109.9 20.71,109.9 16.27,105.47 16.27,99.31 | 75.62,21.68 76.24,21.05 76.24,20.84 EPD_C10.1 | 75.62,21.68 75.62,22.58 75.76,22.71 76.87,22.71 76.97,22.61 | 76.97,22.61 77.08,22.51 77.08,21.74 77.7,21.12 77.7,20.91 EPD_C9.1 77.77,20.84 77.91,20.71 v77.91,20.15 | v78.88,20.15 79.08,20.36 79.08,20.84 EPD_C8.1 | EPD_C7.1 80.61,20.91 80.75,20.91 81.92,22.09 EPD_C6.1 | EPD_C1.1 88.78,20.84 88.78,21.05 89.4,21.68 89.4,22.58 89.26,22.71 82.55,22.71 81.99,22.16 EPD_C6.1 | 76.97,22.61 77.63,23.27 80.54,23.27 81.78,22.02 EPD_C6.1 | 71.74,12.95 76.31,12.95 J1.MP2 76.38,12.95 78.74,12.95 80.81,15.03 80.81,15.37 J1.17 80.88,15.03 81.16,14.75 85.04,14.75 85.32,15.03 85.32,15.37 J1.8 85.39,15.44 85.39,15.86 85.66,16.14 85.66,19.88 | 71.74,12.95 70.98,12.95 70.08,13.85 69.87,13.85 R4.1 69.8,13.92 69.25,13.92 68.21,14.96 67.45,14.96 67.03,14.54 67.03,13.5 66.58,13.05 | 85.66,19.88 85.66,20.77 EPD_C5.1 | v87.32,19.88 87.32,20.77 EPD_C2.1 | v85.73,19.88 85.66,19.88 | 71.74,12.95 71.74,18.07 EPD_C11.1 72.02,18.21 71.95,18.14 70.64,18.14 EPD_C12.1 70.64,18.21 69.94,18.91 69.94,19.88 71.74,21.68 75.62,21.68 | J1.MP1 89.82,12.88 86.08,12.88 83.52,10.32 71.26,10.32 69.18,8.24 66,8.24 65.16,9.07 65.16,9.28 SJ1.1 65.09,9.35 65.09,11.49 R2.1 65.09,11.56 66.58,13.05 | U3.13 80.54,55.19 80.54,54.91 82.96,52.49 83.58,52.49 C8.2 83.65,52.42 84.35,51.73 | 84.35,51.73 87.39,51.73 89.89,54.22 93.07,54.22 C10_SUPERCAP.1 93.14,54.22 v96.67,50.69
  Top 0.15: 76.04,27.56 73.89,27.56 73.27,26.94 D6.1 | 76.04,27.56 78.25,27.56 80.88,30.19 80.88,30.68 C7.2 80.95,30.61 83.24,32.89 83.24,34.62 83.48,34.87 | 83.48,34.87 84.69,36.08 86.08,36.08 86.63,35.52 88.85,35.52 D3.1 | 84.35,51.73 84.35,47.71 77.42,40.79 77.42,36.42 78.53,35.32 83.03,35.32 83.48,34.87 | 66.58,13.05 66.06,13.57 66.06,17.24 74.51,25.69 75.69,25.69 76.04,26.04 76.04,27.56 | v111.49,40.1 112.19,40.1 112.32,40.23 IC4.2 112.39,40.3 114.61,40.3 115.02,40.72 115.72,40.72 118.35,43.35 C3.- 118.83,42.94 116.41,45.36 115.72,45.36 R2_BAT.1 115.65,45.36 114.75,45.36 109.35,39.96 106.3,39.96 R1_PWRUSB.1 106.23,39.96 105.12,41.06 | 105.12,41.06 104.64,41.06 C1_BAT2.2 | U4.4 125.62,50 125.97,50 126.52,50.55 126.52,50.69 U4.9 | U4.9 126.59,50.76 125.9,51.45 125.62,51.45 U4.1 125.55,51.52 121.33,51.52 120.98,51.87 C2_BAT.2 120.91,51.87 118.07,51.87 116.86,50.66 | U4.9 126.52,50.48 127.56,50.48 U4.6 127.63,50.48 128.18,50.48 131.44,53.74 131.44,54.36 TP4.TP 131.44,54.43 135.87,54.43 TP5.TP 135.94,54.36 139.12,54.36 142.66,50.83 149.23,50.83 C4_USB.2 149.3,50.76 151.03,50.76 151.31,50.48 D1.2 151.38,50.48 151.59,50.48 154.7,53.6 155.4,53.6 C5_USB.2 155.47,53.67 159.14,57.34 163.22,57.34 J2.B1 163.29,57.41 163.29,57.62 J2.A12 163.29,57.69 163.29,58.79 163.84,59.35 J2.MP4 163.91,59.42 165.85,59.42 | 116.86,50.66 117.79,49.72 118.07,49.72 MCP73831.2 | 105.12,41.06 105.12,49.44 106.64,50.97 107.68,50.97 108.38,50.28 C1_BAT.2 108.44,50.28 109.62,50.28 110.46,51.12 116.4,51.12 116.86,50.66 | 154.08,6.79 C1.2 | 154.08,6.79 153.46,6.79 C2.2
  Top 0.15: 154.08,6.79 154.08,8.24 | 154.08,8.24 154.08,8.93 SENSOR2.7 154.01,9 154.01,10.11 153.25,10.87 153.25,11.84 SENSOR2.1 | 154.08,8.24 155.19,8.24 155.6,8.66 155.6,8.93 SENSOR2.5 155.67,9 164.47,17.8 J3.1 164.54,17.87 164.88,17.87 165.44,18.42 165.44,49.24 | R2-USB1.1 151.87,47.71 151.31,47.16 151.31,45.84 151.52,45.64 152.35,45.64 153.04,46.33 153.18,46.33 R2-USB.2 153.25,46.4 158.79,46.4 162.39,50 v162.46,50 163.08,50 163.84,49.24 J2.MP3 163.91,49.24 165.44,49.24 | v162.32,51.04 162.6,51.31 163.22,51.31 J2.B12 | 165.44,49.24 165.85,49.24 | 165.85,49.24 167.72,49.24 J2.MP1 | 165.85,59.42 167.72,59.42 J2.MP2 | 165.85,59.42 165.85,49.24 | C1_BAT1.2 109.87,37.99 110.97,39.09 v111.04,39.09
  Bottom 0.15: v34.83,41.69 34.83,47.09 v33.1,48.82 17.38,48.82 v15.65,50.55 | v78.88,20.15 v77.91,20.15 77.84,20.15 77.28,19.6 74.17,19.6 56.65,37.12 v44.87,37.12 | v85.73,19.88 v87.32,19.88 | 111.01,39.61 111.01,39.13 v111.04,39.09 | v111.49,40.1 111.01,39.61 | v162.32,51.04 162.32,50.14 v162.46,50 | v96.67,50.69 99.86,50.69 110.94,39.61 111.01,39.61
  other vias: 22.6,71.2 24.07,73.27 14.4,61.4 15.7,57.1 33.1,61 31.1,59.1 10.6,65.7 11.4,61 19.5,60.6 21.7,61 29,54.3 29.3,44.6 38.5,48.1 61.2,50.7 13.4,42.6 18.6,43.7 20.1,43.6 8.9,98 10,94 86.1,29.4 90.4,32.9 68.6,18.2 74.3,18.2 82.8,18.9 93.8,22.1 97.8,19.7 92.7,20.2 79.9,17.6 74,32.1 158.5,50.7 164.6,53.4 114,47.8 123.4,44.5 110.5,39.8 81.2,70.1 87.9,63.7 83.9,67.9 155.5,13 50.5,46.2 58.3,58.3 77.6,28.3 91.2,18.1 89.3,17.3 83.2,22.3 65,55.3 20.41,60.5
  pour Top: 7.06,43.96 7.04,43.94 7.02,43.92 0.08,43.92 0.08,0.08 73.92,0.08 73.92,10.02 73.94,10.04 73.96,10.06 73.98,10.08 92.22,10.08 92.24,10.06 92.26,10.04 92.28,10.02 92.28,0.08 170.12,0.08 170.12,67.12 92.18,67.12 92.16,67.14 92.14,67.16 92.12,67.18 92.12,111.12 74.08,111.12 74.08,110.18 74.06,110.16 74.04,110.14 74.02,110.12 19.98,110.12 19.96,110.14 19.94,110.16 19.92,110.18 19.92,111.12 0.08,111.12 0.08,64.18 7.02,64.18 7.04,64.16 7.06,64.14 7.08,64.12 7.08,43.98
  pour Bottom: 0.36,43.84 0.38,43.82 0.38,-0.17 0.53,-0.32 73.82,-0.32 73.64,-0.14 73.62,-0.12 73.62,9.92 73.64,9.94 73.86,10.16 73.88,10.18 92.22,10.18 92.24,10.16 92.26,10.14 92.28,10.12 92.28,-0.22 170.12,-0.22 170.04,-0.14 170.02,-0.12 170.02,67.13 170.02,67.12 92.78,67.12 92.76,67.14 92.64,67.26 92.62,67.28 92.62,111.12 74.23,111.12 74.18,111.07 74.18,110.28 74.16,110.26 74.14,110.24 74.12,110.22 74.08,110.22 74.06,110.24 73.97,110.32 19.78,110.32 19.76,110.34 19.74,110.36 19.72,110.38 19.72,111.22 19.64,111.14 19.62,111.12 0.07,111.12 0.08,111.12 0.08,111.11 0.08,111.11 0.08,111.1 0.08,111.08 0.08,111.08 0.07,111.08 0.07,111.07 0.06,111.06 0.06,111.05 0.06,111.05 0.05,111.04 -0.02,110.97 -0.02,64.13 0.23,63.88 6.62,63.88 6.64,63.86 7.36,63.14 7.38,63.12 7.38,44.38 7.36,44.36 6.94,43.94 6.92,43.92 0.28,43.92
GPIO8
  Top 0.15: R1.1 19.32,42.8 19.32,45.22 U2.10
I2C_PW  (via drill 0.3)
  Top 0.15: R2-PINH.2 156.16,6.92 R1_PINH.2 156.09,6.86 154.7,5.47 C1.1 153.46,5.47 C2.1 153.39,5.54 152.77,6.16 152.77,7.27 153.18,7.69 153.18,8.93 SENSOR2.8 153.18,9 153.18,10.53 152.77,10.94 152.77,12.46 153.04,12.74 v153.46,12.74 154.01,12.19 154.01,11.91 SENSOR2.2 154.08,11.84 154.08,11.63 154.84,10.87 154.84,9 SENSOR2.6 | v70.98,54.02 64.47,60.52 23.89,60.52 21.95,62.46 21.95,62.74 U2.17
  Bottom 0.15: v70.98,54.02 83.38,54.02 124.65,12.74 v153.46,12.74
INT_RTC
  Top 0.15: U2.8 16.9,45.22 16.9,44.11 18.84,42.17 59.76,42.17 81.78,64.19 81.78,64.54 U3.3 81.85,64.61 81.85,64.96 82.89,66 82.89,66.89 R1_PINH1.1 82.82,66.89 79.22,70.5 78.74,70.5 TP15.TP
IO/BOOT
  Top 0.15: C6.1 27.29,108.52 26.32,108.52 25.69,109.14 BOOT_BUTTON.3 25.62,109.14 22.16,109.14 BOOT_BUTTON.4 22.09,109.14 21.33,108.38 21.19,108.38 | 21.19,108.38 20.29,108.38 R_BOOT.1 | 21.19,108.38 21.19,107.06 24.73,103.53 24.73,72.78 24.45,72.51 U2.15
IO/CHANGE  (via drill 0.3)
  Top 0.15: C10.1 67.31,108.52 66.48,108.52 65.79,109.21 CHANGE_BUTTON.3 65.72,109.21 62.33,109.21 CHANGE_BUTTON.4 62.26,109.21 62.12,109.21 61.29,108.38 61.29,107.96 60.66,107.34 60.66,107.2 R_CHANGE.1 60.59,107.13 v58.45,107.13 | U2.23 14.34,62.81 14.34,63.58 22.41,71.65 22.97,71.65 v23.96,72.64
  Bottom 0.15: v58.45,107.13 24.53,73.21 24.53,73.08 24.26,72.82 24.14,72.82 v23.96,72.64
MISO  (via drill 0.3)
  Top 0.15: v6.92,93.69 J4.P7 | v15.23,85.39 15.23,78.46 16.07,77.63 TP6.TP 16.07,77.56 16.07,74.58 9.21,67.73 9.21,62.81 U2.27 9.21,62.53 13.43,58.31 31.72,58.31 33.73,56.3 33.73,55.82 33.03,55.12 33.03,54.85 U1.2 32.96,54.91 31.99,53.95 31.99,52.22 v32.55,51.66 | v39.27,33.45 39.2,33.45 38.57,32.83 R8.1 | v39.27,38.78 38.43,39.61 D12.2 38.36,39.68 v38.36,41.69
  Bottom 0.15: v15.23,85.39 v6.92,93.69 | v39.27,38.78 v39.27,33.45 | v38.36,41.69 38.36,45.84 v32.55,51.66
MOSI  (via drill 0.3)
  Top 0.15: v82.41,16.2 82.41,15.44 J1.14 | v43.14,33.59 42.45,34.28 R7.1 42.59,34.21 45.36,36.98 45.36,40.03 44.94,40.44 43.63,40.44 42.66,39.47 D11.2 42.59,39.47 v40.79,41.27 | J4.P3 5.75,89.26 5.75,89.12 4.85,88.22 4.85,83.79 11.01,77.63 TP7.TP 11.01,77.56 v9.76,76.31 | v40.79,42.66 40.79,52.22 U1.5 | v19.39,49.31 16.17,46.09 | 16.17,46.09 15.58,45.5 15.58,45.29 U2.7 | 16.17,46.09 v15.86,46.4
  Bottom 0.15: v82.41,16.2 60.52,16.2 v43.14,33.59 | v40.79,42.66 v40.79,41.27 40.79,41.2 38.23,41.2 37.88,41.55 37.88,44.67 33.24,49.31 v19.39,49.31 | v9.76,76.31 9.76,49.38 12.74,46.4 v15.86,46.4
N$2
  Top 0.15: R2-USB1.2 153.25,47.78 157.41,47.78 162.67,53.05 163.22,53.05 J2.A5
N$3
  Top 0.15: R2-USB.1 151.94,46.4 152.21,46.4 152.9,47.09 158.93,47.09 162.39,50.55 164.4,50.55 165.05,51.21 165.05,54.82 163.84,56.02 163.29,56.02 J2.B5
N$4
  Top 0.15: R2_BAT.2 115.65,46.74 115.65,48.54 115.51,48.68 MCP73831.5
N$5
  Top 0.15: 111.01,39.61 112.12,39.61 112.32,39.4 IC4.3 112.39,39.4 114.12,39.4 115.16,40.44 117.03,40.44 118.28,41.69 121.39,41.69 | C1_BAT1.1 108.58,38.02 108.72,38.02 110.05,39.35 110.69,39.35 110.95,39.61 111.01,39.61 | 111.01,39.61 111.01,40.23 111.98,41.2 112.32,41.2 IC4.1 | 121.39,41.69 122.09,41 122.09,40.1 D2.1 | 121.39,41.69 121.39,43.21 124.44,46.26 Q1.2
N$6
  Top 0.15: C9.2 10.66,99.65 10.66,99.51 11.36,98.82 11.36,97.5 6.51,92.66 5.68,92.66 J4.P6
N$7
  Top 0.15: CHG_LED.C 110.59,50.14 110.59,49.03 110.87,48.75 R1_BAT.1
N$8
  Top 0.15: 86.36,34.56 90.92,34.56 C4.1 | 86.36,34.56 85.45,35.46 D3.2 | D4.1 85.52,31.72 85.52,33.66 86.36,34.49 86.36,34.56
N$9
  Top 0.15: R1_BAT.2 112.25,48.75 114.33,48.75 114.82,49.24 117.38,49.24 117.86,48.75 118.07,48.75 MCP73831.1
N$10
  Top 0.15: J1.4 87.39,15.44 87.39,19.32 88.02,19.94 88.02,21.4 88.71,22.09 EPD_C1.2
N$11
  Top 0.15: C_DELAY.1 51.87,102 50.28,102 50.07,102.21 IC1.5
N$12  (via drill 0.3)
  Top 0.15: v82.61,67.8 82.61,68.9 D7.1 | v88.92,61.49 88.92,55.75 R_CAPACITOR.1
  Bottom 0.15: v88.92,61.49 v82.61,67.8
N$13
  Top 0.15: J1.5 86.84,15.44 86.84,20.15 86.63,20.36 86.63,21.47 87.25,22.09 EPD_C2.2
N$14
  Top 0.15: J1.24 77.28,15.44 75.97,15.44 72.44,18.97 71.05,18.97 70.64,19.39 EPD_C12.2
N$15
  Top 0.15: J1.22 78.32,15.44 78.32,19.11 77.01,20.43 77.01,21.4 76.31,22.09 EPD_C10.2
N$16
  Top 0.15: EPD_C8.2 79.08,22.16 78.46,21.54 78.46,20.43 78.39,20.36 78.39,20.01 79.3,19.1 79.3,18.04 79.17,17.9 79.17,17.3 79.35,17.12 J1.20
N$17
  Top 0.15: EPD_C7.2 80.54,22.09 79.84,21.4 79.84,18.19 79.45,17.79 79.45,17.41 79.84,17.01 J1.19
N$18
  Top 0.15: J1.18 80.4,15.44 80.4,19.25 81.92,20.77 EPD_C6.2
PREVGH  (via drill 0.3)
  Top 0.15: v78.88,18.91 78.88,15.44 J1.21 | v78.46,22.78 78.32,22.78 77.77,22.23 EPD_C9.2 | v82.06,38.92 82.06,40.51 D5.1
  Bottom 0.15: v78.46,22.78 79.36,21.88 79.36,20.01 78.88,19.53 v78.88,18.91 80.95,18.91 82.89,16.97 82.89,16.9 85.11,14.68 91.55,14.68 92.59,15.72 92.59,17.8 82.06,28.32 v82.06,38.92
PREVGL  (via drill 0.3)
  Top 0.15: 74.1,19.53 77.84,15.79 77.84,15.44 J1.23 | 74.1,19.53 72.09,19.53 EPD_C11.2 | v78.53,24.31 79.36,24.31 86.7,31.65 88.92,31.65 D4.2 | v74.31,20.08 74.31,19.8 74.1,19.6 74.1,19.53
  Bottom 0.15: v74.31,20.08 v78.53,24.31
RESE
  Top 0.15: 69.11,10.6 83.38,10.6 87.81,15.03 87.81,15.37 J1.3 | 69.11,10.6 68.77,10.25 R3.2 | Q3.2 67.86,14.2 67.86,11.91 69.11,10.66 69.11,10.6
RESE'
  Top 0.15: R3.1 68.7,8.93 67.03,8.93 66.69,9.28 SJ1.2 66.62,9.35 66.41,9.56 66.41,11.49 R2.2
RESET  (via drill 0.3)
  Top 0.15: C5.1 52.15,108.38 51.59,108.38 50.69,109.28 RESET_BUTTON.3 50.62,109.21 49.31,109.21 48.34,108.24 v48.27,108.24 47.3,109.21 47.16,109.21 RESET_BUTTON.4 47.09,109.21 46.26,108.38 45.22,108.38 R_RESET.1 | v48.06,102.42 47.92,102.28 47.3,102.28 IC1.1 | v10.53,49.86 10.53,45.29 U2.3
  Bottom 0.15: v48.27,108.24 48.06,108.03 v48.06,102.42 48.06,102.35 10.53,64.82 v10.53,49.86
RTC_RST
  Top 0.15: U2.16 23.2,62.74 23.2,62.46 23.89,61.77 78.05,61.77 80.47,64.19 80.47,64.54 U3.4
RX
  Top 0.15: U2.24 13.09,62.81 13.09,66.34 14.2,67.45 TP2.TP
SCK  (via drill 0.3)
  Top 0.15: v82.41,16.83 82.89,16.34 82.89,15.44 J1.13 | v45.29,32.06 44.6,32.76 R6.1 | v6.79,90.65 5.96,91.48 5.82,91.48 J4.P5 | v6.79,78.67 6.79,78.46 5.96,77.63 TP8.TP | v43.77,50.48 40.79,53.46 U1.6 | v43.77,39.96 44.18,39.96 44.6,39.54 D10.2 44.6,39.47 v43.9,38.78 | v20.91,52.15 19.84,51.07 | 19.84,51.07 14.34,45.57 14.34,45.29 U2.6 | 19.84,51.07 v9.28,61.63
  Bottom 0.15: v82.41,16.83 60.52,16.83 v45.29,32.06 45.29,36.08 43.9,37.46 v43.9,38.78 | v6.79,90.65 v6.79,78.67 6.79,64.75 9.28,62.26 v9.28,61.63 | v43.77,39.96 v43.77,50.48 43.7,50.48 42.03,52.15 v20.91,52.15
SCL  (via drill 0.3)
  Top 0.15: R2-PINH.1 157.2,5.61 156.5,4.92 152.84,4.92 152.49,5.26 152.49,12.6 153.11,13.23 154.57,13.23 155.6,12.19 155.6,11.91 SENSOR2.4 155.6,12.26 v156.09,12.74 | v162.67,19.32 164.12,20.77 164.47,20.77 J3.4 | 128.18,51.24 127.97,51.04 127.63,51.04 U4.7 | 128.18,51.24 128.18,51.66 v125.34,54.5 | v85.04,54.5 84.35,55.19 U3.16 | U2.20 18.14,62.74 18.14,62.49 19.58,61.05 19.69,61.05 19.95,60.79 19.95,60.31 21.19,59.07 v27.35,59.07 | v128.32,51.24 128.18,51.24
  Bottom 0.15: v156.09,12.74 161.46,18.11 | 161.46,18.11 v162.67,19.32 | v125.34,54.5 v85.04,54.5 32.13,54.5 27.56,59.07 v27.35,59.07 | v128.32,51.24 161.46,18.11
SDA  (via drill 0.3)
  Top 0.15: 156.57,12.88 155.95,13.5 152.97,13.5 152.21,12.74 152.21,5.12 152.7,4.64 157.61,4.64 158.17,5.19 158.17,6.03 157.96,6.23 156.99,6.23 156.44,5.68 156.16,5.68 R1_PINH.1 | 156.57,12.88 156.57,11.77 155.95,11.15 155.33,11.15 154.91,11.56 154.91,11.84 SENSOR2.3 | v163.29,19.32 163.71,19.74 164.47,19.74 J3.3 | 156.57,12.88 v156.85,12.88 | v125.27,53.81 127.56,51.52 U4.8 | v84.21,53.81 83.1,54.91 83.1,55.19 U3.15 83.03,55.26 83.03,55.61 v81.99,56.65 | v45.01,59.55 22.3,59.55 19.39,62.46 19.39,62.74 U2.19
  Bottom 0.15: v156.85,12.88 v163.29,19.32 163.29,19.39 128.87,53.81 v125.27,53.81 v84.21,53.81 | v45.01,59.55 79.08,59.55 v81.99,56.65
SRC
  Top 0.15: 80.4,38.02 87.67,38.02 89.82,35.87 90.92,35.87 C4.2 91,35.8 91.62,35.18 91.62,33.03 89.61,31.02 89.19,31.02 81.99,23.82 73.06,23.82 67.24,18 67.24,16.34 Q3.3 | 80.4,38.02 L1.1 | 80.4,38.02 L1.1 | L1.1 78.53,39.89 78.53,40.51 D5.2
SS_SD  (via drill 0.3)
  Top 0.15: D8.2 15.65,98.54 14.96,97.85 13.64,97.85 13.16,98.33 12.26,98.33 R10.1 12.26,98.27 12.26,94.25 6.23,88.22 J4.P2 6.23,88.16 v10.25,84.14 | v11.7,48.06 11.7,45.29 U2.4
  Bottom 0.15: v11.7,48.06 10.04,49.72 10.04,75.97 10.25,76.17 v10.25,84.14
TX
  Top 0.15: U2.25 11.7,62.81 11.7,66.06 10.53,67.24 TP1.TP
USB_D+  (via drill 0.3)
  Top 0.15: v97.78,55.75 138.15,55.75 142.45,51.45 151.31,51.45 D1.1 | v23.55,46.4 24.45,45.5 24.45,45.29 U2.14
  Bottom 0.15: v23.55,46.4 19.18,46.4 15.17,50.41 15.17,54.57 20.15,59.55 27.49,59.55 31.29,55.75 65.19,55.75 v97.78,55.75
USB_D-  (via drill 0.3)
  Top 0.15: v150.2,49.58 151.31,49.58 D1.3 | v22.3,44.11 23.13,44.94 23.13,45.22 U2.13
  Bottom 0.15: v150.2,49.58 133.51,49.58 126.87,56.23 82.2,56.23 82.13,56.16 31.3,56.16 27.63,59.83 20.01,59.83 14.89,54.71 14.89,50.28 21.05,44.11 v22.3,44.11
VBAT
  Top 0.3: MCP73831.3 118.14,50.62 120.91,50.62 C2_BAT.1 121.05,50.55 121.88,50.55 123.47,48.96 123.61,48.89 | U4.2 125.62,50.97 125.62,50.48 U4.3 125.48,50.41 125.14,50.41 124.69,49.96 | 123.61,48.89 123.61,48.41 Q1.3 | 124.69,49.96 123.61,48.89 | 124.69,49.96 125.14,49.51 128.04,49.51 129.08,50.55 131.23,50.55 TP3.TP
VBUS
  Top 0.15: MCP73831.4 115.44,50.62 115.02,50.21 112.12,50.21 CHG_LED.A 112.05,50.14 112.05,49.72 111.49,49.17 111.49,48.2 | 106.3,48.06 106.3,49.44 107.06,50.21 C1_BAT.1 | 106.3,48.06 106.3,41.2 R1_PWRUSB.2 | 111.49,48.2 111.35,48.06 106.3,48.06 | 151.03,48.96 152.07,48.96 153.53,50.41 153.8,50.41 D1.5 153.87,50.48 154.08,50.48 155.4,51.8 155.4,52.28 C5_USB.1 | 151.03,48.96 150.2,48.96 149.65,49.51 149.3,49.51 C4_USB.1 149.23,49.58 136.35,49.58 135.66,50.28 TP14.TP 135.59,50.28 132.68,50.28 129.22,46.81 125.14,46.81 | 151.03,48.96 151.03,45.7 153.11,43.63 153.94,43.63 PFMF.050.1.2 | 125.14,46.81 125,46.95 123.27,46.95 122.64,46.33 Q1.1 122.57,46.26 122.43,46.12 113.64,46.12 111.56,48.2 111.49,48.2 | D2.2 122.16,42.17 122.16,42.62 125.14,45.59 125.14,46.81
VRTC
  Top 0.15: U3.14 81.85,55.19 81.85,54.85 82.68,54.02 83.17,54.02 84.69,52.49 84.9,52.49 C8.1 84.97,52.49 86.84,54.36 88.92,54.36 R_CAPACITOR.2 88.99,54.43 91,56.44 93.07,56.44 C10_SUPERCAP.2
VUSB  (via drill 0.3)
  Top 0.15: J2.A4 163.29,51.8 163.29,52.01 J2.B9 163.22,52.08 v162.32,52.08 | J2.A9 163.29,56.78 163.29,56.58 J2.B4 163.22,56.51 162.67,56.51 v162.32,56.16 | v150.62,44.74 149.51,43.63 PFMF.050.1.1
  Bottom 0.15: v162.32,56.16 v162.32,52.08 157.96,52.08 v150.62,44.74